# Altium PCB PCB1.PcbDoc
Units mm, origin at the board's own origin, x right, y up, seen from the top; angles counter-clockwise.
Board outline 100.08 x 50.04 mm, 2 copper layers (Top Layer, Bottom Layer); 21 components, 21 nets, 68 pads, 8 vias.
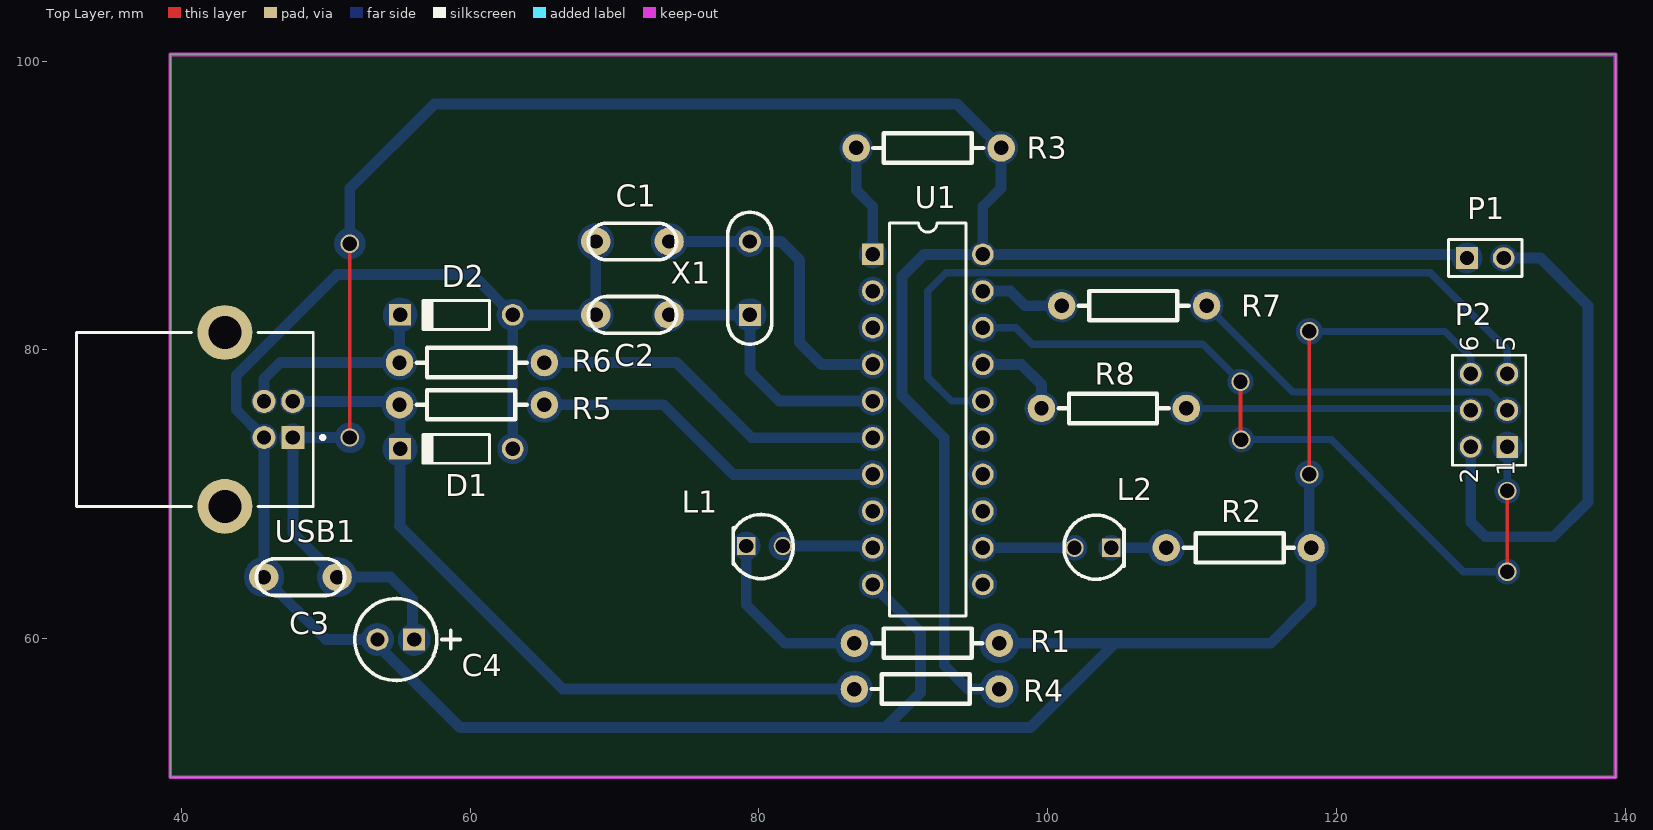
[diagram p0: Top Layer view]
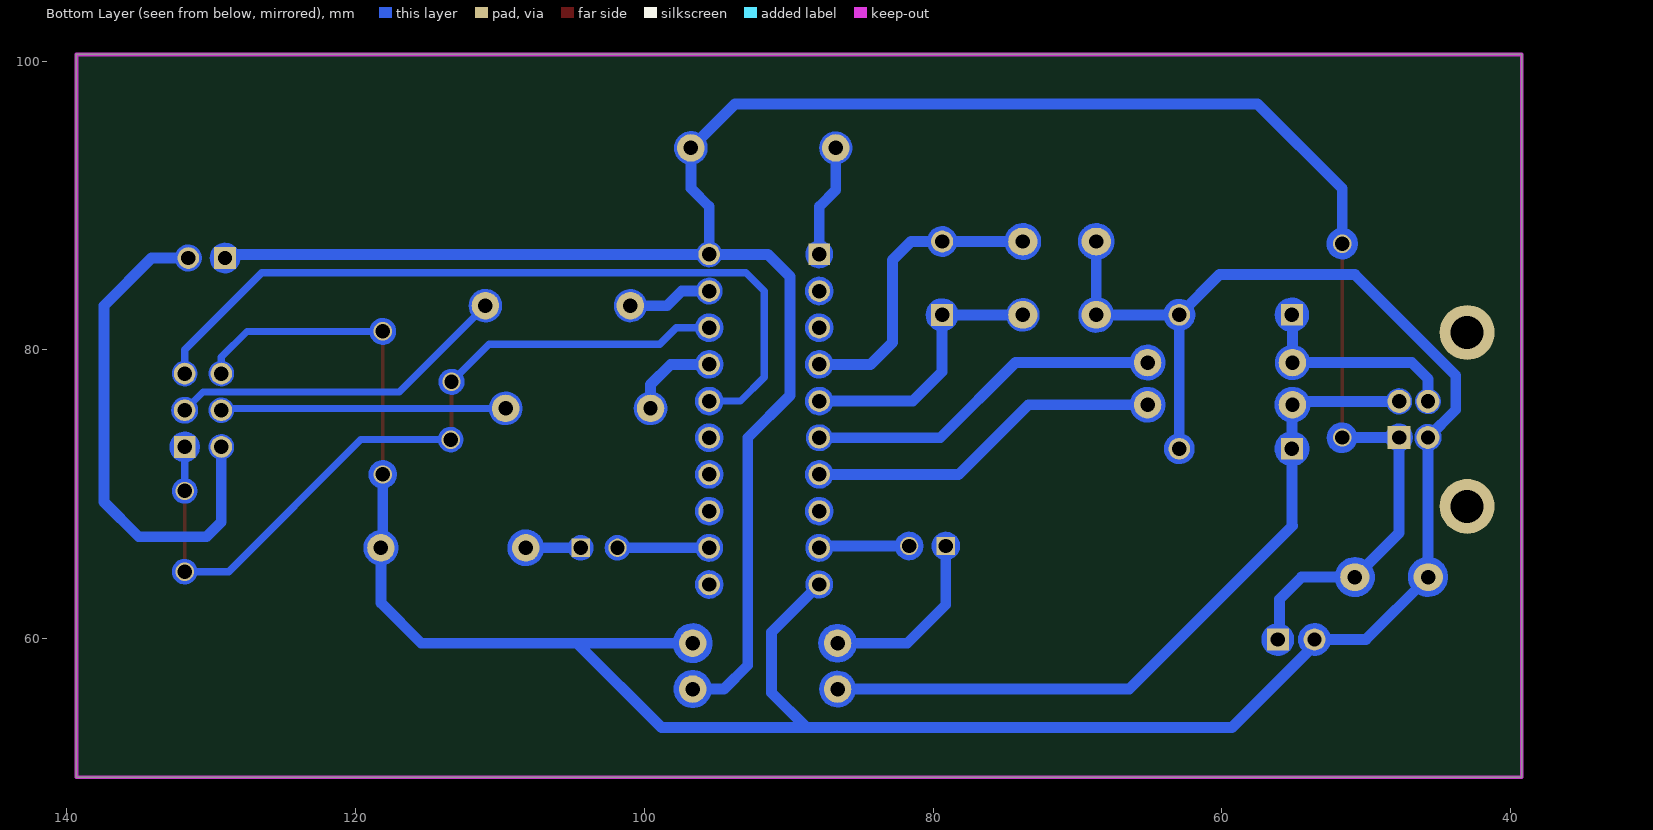
[diagram p1: Bottom Layer view, seen from below]
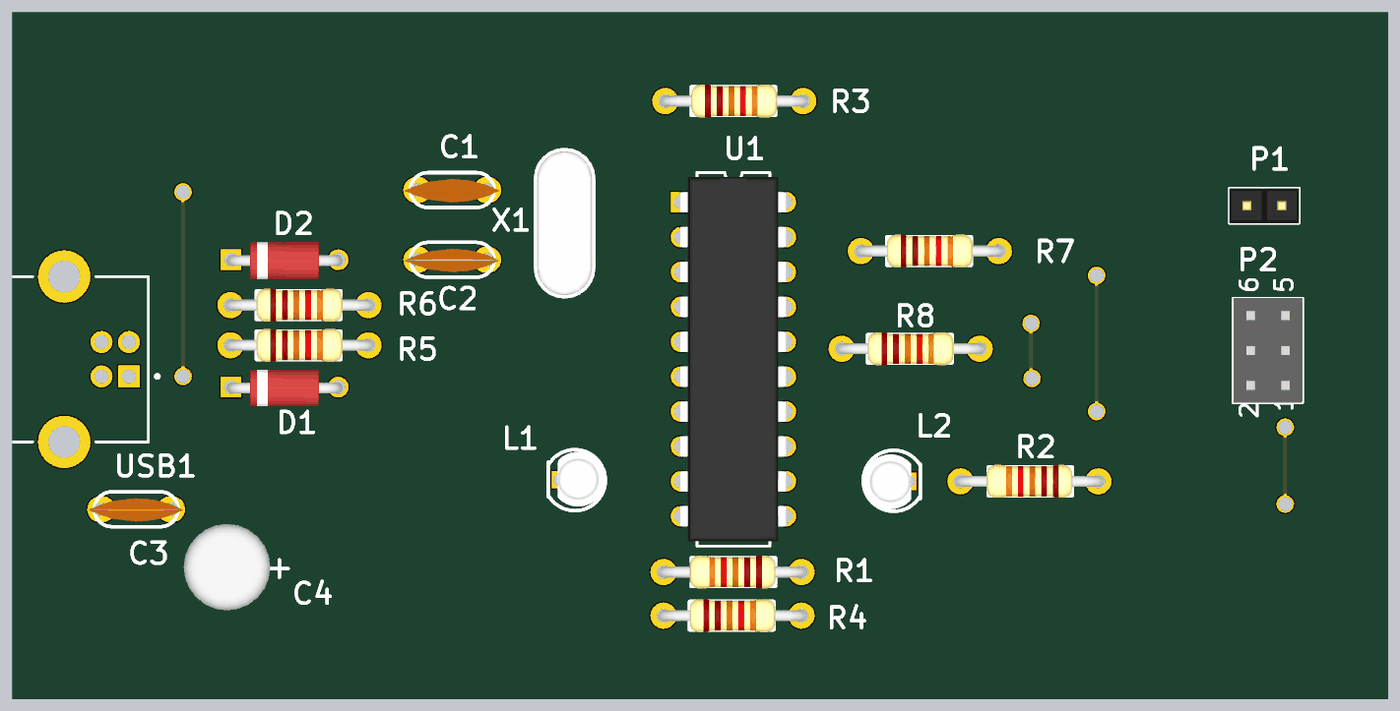
[diagram p2: 3D render of the assembled board from above, using the file's embedded part models]

## Layer stack, top to bottom
Top Layer: signal copper 0.0356
Dielectric: dielectric 0.32, FR-4, Dk 4.8
Bottom Layer: signal copper 0.0356

## Board outline
39.243,50.419 39.243,100.457 139.319,100.457 139.319,50.419

## Design rules (kind name [scope] priority, off if disabled: settings)
Clearance [All] p1 off: gap=0.254
Height [All] p1 off: minheight=0 maxheight=25.4 prefheight=12.7
NetAntennae [All] p1 off: netantennaetolerance=0
PolygonConnect [All] p1: connectstyle=Relief reliefconductorwidth=0.254 reliefentries=4 polygonreliefangle="90 Angle"
RoutingVias [All] p1: holewidth=0.711 width=1.27 viastyle="Through Hole" minholewidth=0.711 minwidth=1.27 maxholewidth=0.711 maxwidth=1.27
SilkscreenOverComponentPads [All] p1: minsilkscreentomaskgap=0.254
SolderMaskExpansion [All] p1: expansion=0.102
Width [All] p1 off: maxlimit=1 minlimit=0.254 preferedwidth=0.75 toplayer_maxwidth=0.254 toplayer_prefwidth=0.254 bottomlayer_minwidth=0.5 minimp=50.000000 maximp=50.000000 favimp=50.000000
25 further rules are at their usual default settings.

## Components (designator, comment, footprint, x,y, rotation, side; value= is the part's Value field where it differs from the comment)
C1 "Cap" "CAP CER 100nF (25V) - UP" 68.707,87.503 r0 top
C2 "Cap" "CAP CER 100nF (25V) - UP" 68.707,82.423 r0 top
C3 "Cap" "CAP CER 100nF (25V) - UP" 45.72,64.262 r0 top
C4 "CAP100RP-SC" CAP100RP 56.134,59.944 r180 top
D1 "D Zener" "DIODE ZENER" 59.055,73.152 r180 top
D2 "D Zener" "DIODE ZENER" 59.055,82.423 r180 top
L1 "LED3MM" LED3MM 79.121,66.421 r90 top
L2 "LED3MM" LED3MM 104.394,66.294 r270 top
P1 "Header 2" HEADER1X2 129.032,86.36 r0 top
P2 "Header 3X2" ISP 131.826,73.279 r90 top
R1 "Res3" "AXIAL-0.4 - DOWN" 96.647,59.69 r180 top
R2 "Res3" "AXIAL-0.4 - DOWN" 118.237,66.294 r180 top
R3 "Res1" "AXIAL-0.4 - DOWN" 86.741,93.98 r0 top
R4 "Res3" "AXIAL-0.4 - DOWN" 86.614,56.515 r0 top
R5 "Res3" "AXIAL-0.4 - DOWN" 55.118,76.2 r0 top
R6 "Res3" "AXIAL-0.4 - DOWN" 55.118,79.121 r0 top
R7 "Res3" "AXIAL-0.4 - DOWN" 100.965,83.058 r0 top
R8 "Res3" "AXIAL-0.4 - DOWN" 99.568,75.946 r0 top
U1 "AT90S2313-10PC" DIP-20P 91.694,75.184 r270 top
USB1 "USB" USB2.5-2H4D 46.736,75.184 r180 top
X1 "CRISTAL" CRISTAL 79.375,82.423 r90 top

## Footprints (in the part's own frame and the unit in brackets; to place one, negate y for a bottom-side part, rotate by r counter-clockwise, add the part's x,y. Pads: shape width x height; smd on the part's side, far side on the other; paste and mask are expansions set on the pad)
"AXIAL-0.4 - DOWN" [mm]
  round 1.905 hole 1: 1(0,0) 2(10.033,0)
  silkscreen extent 1.19,-1.02 8.81,1.02, body extent -0.39,-1.2 10.41,1.2, height 2.6
CAP100RP [mil]
  round 60 hole 39.37: 1(100,0)
  rect 60x60 hole 39.37: 2(0,0)
  silkscreen extent -125,-112 162,112, body extent -74,-128 174,120, height 472
"CAP CER 100nF (25V) - UP" [mm]
  oval 2.032x1.905 hole 1: 1(0,0) 2(5.08,0)
  silkscreen extent -0.5,-1.27 5.58,1.27, body extent -1,-0.9 6,0.8, height 7.5
CRISTAL [mil]
  rect 60x60 hole 39.37: 1(0,0)
  round 60 hole 39.37: 2(200,0)
  silkscreen extent -80,-60 280,60, body extent -111,-90 321,87, height 142
"DIODE ZENER" [mm] "Diode, Axial; Body 4.6 x 1.9 mm (LxDia. max), Lead Dia. 0.53 mm (max)"
  round 1.5 hole 1: 1(-3.9,0)
  rect 1.5x1.5 hole 1: 2(3.9,0)
  silkscreen extent -2.3,-1 2.4,1, body extent -4.2,-1.27 4.2,1.4, height 1.27
DIP-20P [mm] "DIP; 20 Leads; Row Spacing 7.62 mm; Pitch 2.54 mm"
  rect 1.5x1.5 hole 1: 1(-11.43,-3.81)
  round 1.5 hole 1: 2(-8.89,-3.81) 3(-6.35,-3.81) 4(-3.81,-3.81) 5(-1.27,-3.81) 6(1.27,-3.81) 7(3.81,-3.81) 8(6.35,-3.81) 9(8.89,-3.81) 10(11.43,-3.81) 11(11.43,3.81) 12(8.89,3.81) 13(6.35,3.81) 14(3.81,3.81) 15(1.27,3.81) 16(-1.27,3.81) 17(-3.81,3.81) 18(-6.35,3.81) 19(-8.89,3.81) 20(-11.43,3.81)
  silkscreen extent -13.6,-2.65 13.6,2.65, body extent -13.27,-3.94 13.27,3.88, height 4.57
HEADER1X2 [mm] "Connector; Header; 2 Position"
  rect 1.5x1.5 hole 1: 1(0,0)
  round 1.5 hole 1: 2(2.54,0)
  silkscreen extent -1.27,-1.27 3.81,1.27, body extent -1.27,-1.27 3.81,1.27, height 8.43
ISP [mm] "Connector; Header; 3x2 Position;ISP"
  rect 1.5x1.5 hole 1: 1(0,0)
  round 1.5 hole 1: 2(0,2.54) 3(2.54,0) 4(2.54,2.54) 5(5.08,0) 6(5.08,2.54)
  silkscreen extent -1.27,-1.27 6.35,3.81, body extent -1.27,-1.27 6.35,3.77, height 8.5
LED3MM [mm]
  round 1.27 hole 1: 1(0,-2.54)
  rect 1.27x1.27 hole 1: 2(0,0)
  silkscreen extent -2.26,-3.26 2.18,0.89, body extent -1.97,-3.28 2.03,0.24, height 25.4
USB2.5-2H4D [mm] "Connector; USB1.1, Type B, Thru-Hole; 4 Position; Right Angle"
  rect 1.6x1.6 hole 1: 1(-1,1.25)
  round 1.6 hole 1: 2(-1,-1.25) 3(1,-1.25) 4(1,1.25)
  round 3.8 hole 2.3: 5(3.71,6.02) 6(3.71,-6.02)
  silkscreen extent -3.18,-6.02 13.99,6.02, body extent -2.41,-6.02 13.99,6.02, height 11.1

## Part data
C1 C2 C3: "Capacitor"
D1 D2: "Zener Diode"
P1: "Header, 2-Pin"
P2: "Header, 3-Pin, Dual row"
R1 R2 R3 R4 R5 R6 R7 R8: "Resistor"
U1: "8-Bit AVR Microcontroller with 2K Bytes of In-System Programmable Flash Memory"

## Via types
v1: diameter 1.27, hole 1, Top Layer to Bottom Layer, 8 vias

## Nets (pads, with @x,y where several pads share a name; then routed paths per layer and width w, separated by ;. In a path a pad name is that pad's centre, name@x,y a point inside that pad or via, vN(x,y) a via of type N, cw(c..) or ccw(c..) an arc to the next point about the centre after c; other vN are vias at no path point)
GND: C1.1 C2.1 C3.1 C4.1 D1.1 D2.1 P2.6 R1.1 R2.1 U1.10 USB1.4 | length 262
  Top Layer w0.254: v1(118.11,71.374) v1(118.11,81.28)
  Bottom Layer w0.5: v1(118.11,81.28) 127.508,81.28 129.286,79.502 P2.6 ; USB1.4@46.429,73.934 ccw(c45.736,73.934) USB1.4@46.429,73.934 ; 46.879,64.278 ccw(c45.736,64.278) 46.879,64.278 ; 54.483,59.944 ccw(c53.594,59.944) 54.483,59.944 ; 63.774,73.152 ccw(c62.955,73.152) 63.774,73.152 ; 63.816,82.423 ccw(c62.955,82.423) 63.816,82.423 ; C2.1@69.699,82.423 ccw(c68.707,82.423) C2.1@69.699,82.423 ; 69.731,87.503 ccw(c68.707,87.503) 69.731,87.503 ; U1.10@88.602,63.754 ccw(c87.884,63.754) U1.10@88.602,63.754 ; 97.783,59.69 ccw(c96.647,59.69) 97.783,59.69 ; 118.794,81.28 ccw(c118.11,81.28) 118.794,81.28 ; 118.851,71.374 ccw(c118.11,71.374) 118.851,71.374 ; 119.204,66.294 ccw(c118.237,66.294) 119.204,66.294 ; P2.6@129.921,78.359 ccw(c129.286,78.359) P2.6@129.921,78.359
  Bottom Layer w0.75: D1.1 D2.1 ; C1.1 C2.1 D2.1 ; U1.10 91.186,60.452 91.186,56.261 88.773,53.848 ; R1.1@96.647,59.309 97.028,59.69 104.648,59.69 ; v1(118.11,71.374) 118.11,66.421 R2.1 118.237,62.484 115.443,59.69 104.648,59.69 ; D2.1 60.161,85.217 50.8,85.217 43.815,78.232 43.815,75.855 USB1.4 45.736,64.278 C3.1 50.038,59.944 C4.1 53.594,59.563 59.309,53.848 88.773,53.848 ; 88.773,53.848 98.806,53.848 104.648,59.69
NetC1_2: C1.2 U1.4 X1.2 | length 37.2
  Bottom Layer w0.5: 74.811,87.503 ccw(c73.787,87.503) 74.811,87.503 ; 80.188,87.503 ccw(c79.375,87.503) 80.188,87.503 ; U1.4@88.625,78.994 ccw(c87.884,78.994) U1.4@88.625,78.994
  Bottom Layer w0.75: C1.2 X1.2 81.534,87.503 82.804,86.233 82.804,80.518 84.328,78.994 U1.4
NetC2_2: C2.2 U1.5 X1.1 | length 34.9
  Bottom Layer w0.5: C2.2@74.703,82.423 ccw(c73.787,82.423) C2.2@74.703,82.423 ; 80.273,82.423 ccw(c79.375,82.423) 80.273,82.423 ; U1.5@88.625,76.454 ccw(c87.884,76.454) U1.5@88.625,76.454
  Bottom Layer w0.75: C2.2 X1.1 79.375,78.486 81.407,76.454 U1.5
NetD1_2: D1.2 R4.1 R5.1 USB1.2 | length 78.3
  Bottom Layer w0.5: 54.154,76.434 cw(c55.118,76.2) 56.11,76.2 ; 55.155,75.209 ccw(c55.118,76.2) 56.11,76.2 ; 56.11,76.2 ccw(c55.118,76.2) 56.11,76.2 ; USB1.2@48.396,76.434 ccw(c47.736,76.434) USB1.2@48.396,76.434 ; 56.115,73.152 ccw(c55.155,73.152) 56.115,73.152 ; 87.638,56.515 ccw(c86.614,56.515) 87.638,56.515
  Bottom Layer w0.75: USB1.2 54.154,76.434 ; R5.1 55.155,76.163 55.155,75.209 D1.2 55.155,67.855 55.118,67.818 66.421,56.515 R4.1
NetD2_2: D2.2 R6.1 USB1.3 | length 30.8
  Bottom Layer w0.5: USB1.3@46.378,76.434 ccw(c45.736,76.434) USB1.3@46.378,76.434 ; 56.085,79.121 ccw(c55.118,79.121) 56.085,79.121 ; 56.102,82.423 ccw(c55.155,82.423) 56.102,82.423
  Bottom Layer w0.75: USB1.3 45.736,77.994 46.863,79.121 R6.1 55.124,79.127 D2.2@55.124,82.423
NetL1_1: L1.1 U1.9 | length 15.4
  Bottom Layer w0.5: 82.402,66.421 ccw(c81.661,66.421) 82.402,66.421 ; U1.9@88.602,66.294 ccw(c87.884,66.294) U1.9@88.602,66.294
  Bottom Layer w0.75: L1.1 87.757,66.421 U1.9
NetL1_2: L1.2 R1.2 | length 24.3
  Bottom Layer w0.5: 79.862,66.421 ccw(c79.121,66.421) 79.862,66.421 ; 87.706,59.69 ccw(c86.614,59.69) 87.706,59.69
  Bottom Layer w0.75: L1.2 79.121,62.357 81.788,59.69 86.233,59.69 R1.2@86.614,59.309
NetL2_1: L2.1 U1.12 | length 14.9
  Bottom Layer w0.5: U1.12@96.222,66.294 ccw(c95.504,66.294) U1.12@96.222,66.294 ; 102.489,66.294 ccw(c101.854,66.294) 102.489,66.294
  Bottom Layer w0.75: U1.12 L2.1
NetL2_2: L2.2 R2.2 | length 14.2
  Bottom Layer w0.5: 105.029,66.294 ccw(c104.394,66.294) 105.029,66.294 ; 109.228,66.294 ccw(c108.204,66.294) 109.228,66.294
  Bottom Layer w0.75: L2.2 R2.2
NetP1_2: P1.2 P2.2 | length 43.8
  Bottom Layer w0.5: P2.2@129.921,73.279 ccw(c129.286,73.279) P2.2@129.921,73.279 ; P1.2@132.256,86.36 ccw(c131.572,86.36) P1.2@132.256,86.36
  Bottom Layer w0.75: P2.2 129.286,68.072 130.302,67.056 135.001,67.056 137.414,69.469 137.414,83.058 134.112,86.36 P1.2
NetP2_1: P2.1 U1.18 | length 80.4
  Top Layer w0.254: v1@113.347,73.85 v1(113.347,77.787) ; v1(131.826,64.643) v1(131.826,70.231) v1@131.826,70.612
  Bottom Layer w0.5: U1.18 97.79,81.534 98.933,80.391 110.744,80.391 v1(113.347,77.787) ; v1(113.411,73.787) 119.634,73.787 128.778,64.643 v1(131.826,64.643) ; v1(131.826,70.231) P2.1 ; U1.18@96.245,81.534 ccw(c95.504,81.534) U1.18@96.245,81.534 ; 114.001,77.787 ccw(c113.347,77.787) 114.001,77.787 ; 114.046,73.787 ccw(c113.411,73.787) 114.046,73.787 ; 132.461,64.643 ccw(c131.826,64.643) 132.461,64.643 ; 132.461,70.231 ccw(c131.826,70.231) 132.461,70.231 ; 132.639,73.279 ccw(c131.826,73.279) 132.639,73.279
NetP2_3: P2.3 R7.2 | length 33.9
  Bottom Layer w0.5: R7.2 116.967,77.089 130.556,77.089 P2.3 ; R7.2@111.914,83.058 ccw(c110.998,83.058) R7.2@111.914,83.058 ; P2.3@132.51,75.819 ccw(c131.826,75.819) P2.3@132.51,75.819
NetP2_4: P2.4 R8.2 | length 29.4
  Bottom Layer w0.5: R8.2 P2.4@129.286,75.946 ; R8.2@110.517,75.946 ccw(c109.601,75.946) R8.2@110.517,75.946 ; P2.4@129.921,75.819 ccw(c129.286,75.819) P2.4@129.921,75.819
NetP2_5: P2.5 U1.16 | length 63.6
  Bottom Layer w0.5: U1.16 93.345,76.454 91.694,78.105 91.694,84.074 92.964,85.344 126.492,85.344 131.826,80.01 P2.5 ; U1.16@96.245,76.454 ccw(c95.504,76.454) U1.16@96.245,76.454 ; P2.5@132.461,78.359 ccw(c131.826,78.359) P2.5@132.461,78.359
NetR3_1: R3.1 U1.1 | length 18
  Bottom Layer w0.5: R3.1@87.639,93.98 ccw(c86.741,93.98) R3.1@87.639,93.98 ; U1.1@88.602,86.614 ccw(c87.884,86.614) U1.1@88.602,86.614
  Bottom Layer w0.75: R3.1 86.741,91.059 87.884,89.916 U1.1
NetR5_2: R5.2 U1.7 | length 35.6
  Bottom Layer w0.5: 66.143,76.2 ccw(c65.151,76.2) 66.143,76.2 ; U1.7@88.625,71.374 ccw(c87.884,71.374) U1.7@88.625,71.374
  Bottom Layer w0.75: R5.2 73.406,76.2 78.232,71.374 U1.7
NetR6_2: R6.2 U1.6 | length 35.4
  Bottom Layer w0.5: 66.143,79.121 ccw(c65.151,79.121) 66.143,79.121 ; U1.6@88.568,73.914 ccw(c87.884,73.914) U1.6@88.568,73.914
  Bottom Layer w0.75: R6.2 74.295,79.121 79.502,73.914 U1.6
NetR7_1: R7.1 U1.19 | length 14.9
  Bottom Layer w0.5: U1.19@96.188,84.074 ccw(c95.504,84.074) U1.19@96.188,84.074 ; R7.1@101.863,83.058 ccw(c100.965,83.058) R7.1@101.863,83.058
  Bottom Layer w0.75: U1.19 97.409,84.074 98.425,83.058 R7.1@100.076,83.058
NetR8_1: R8.1 U1.17 | length 16.7
  Bottom Layer w0.5: U1.17@96.245,78.994 ccw(c95.504,78.994) U1.17@96.245,78.994 ; R8.1@100.484,75.946 ccw(c99.568,75.946) R8.1@100.484,75.946
  Bottom Layer w0.75: U1.17 98.171,78.994 99.568,77.597 R8.1
NetU1_11: U1.11
VCC: C3.2 C4.2 P1.1 R3.2 R4.2 U1.20 USB1.1 | length 215.2
  Top Layer w0.254: v1(51.669,73.934) v1(51.669,87.356)
  Bottom Layer w0.5: USB1.1@47.736,73.217 ccw(c47.736,73.934) USB1.1@48.453,73.934 ; 49.997,65.065 cw(c50.8,64.262) 51.936,64.262 ; U1.20@94.856,86.614 cw(c95.504,86.614) 95.504,87.262 cw(c95.504,86.614) U1.20@96.152,86.614 ; USB1.1@48.453,73.934 ccw(c47.736,73.934) USB1.1@48.453,73.934 ; 51.936,64.262 ccw(c50.8,64.262) 51.936,64.262 ; U1.20@96.152,86.614 ccw(c95.504,86.614) U1.20@96.152,86.614 ; 52.502,73.914 ccw(c51.689,73.914) 52.502,73.914 ; 52.51,87.356 ccw(c51.669,87.356) 52.51,87.356 ; 57.023,59.944 ccw(c56.134,59.944) 57.023,59.944 ; R3.2@97.69,93.98 ccw(c96.774,93.98) R3.2@97.69,93.98 ; 129.845,86.36 ccw(c129.032,86.36) 129.845,86.36
  Bottom Layer w0.75: USB1.1@47.736,73.217 47.736,67.326 49.997,65.065 C3.2 ; USB1.1 48.453,73.934 v1(51.669,73.934) ; v1(51.669,87.356) 51.669,91.166 57.531,97.028 93.726,97.028 R3.2 96.774,91.186 95.504,89.916 U1.20@95.504,87.262 ; 51.936,64.262 54.483,64.262 56.007,62.738 56.007,60.071 C4.2 ; U1.20 94.856,86.614 91.44,86.614 89.916,85.09 89.916,76.835 92.837,73.914 92.837,58.166 94.488,56.515 R4.2 ; U1.20@96.152,86.614 128.778,86.614 P1.1
pads on no net: U1.2 U1.3 U1.8 U1.13 U1.14 U1.15 USB1.5 USB1.6
copper on no net: | length 39.3
  Bottom Layer w0.5: 88.625,68.834 ccw(c87.884,68.834) 88.625,68.834 ; 88.625,81.534 ccw(c87.884,81.534) 88.625,81.534 ; 88.625,84.074 ccw(c87.884,84.074) 88.625,84.074 ; 96.245,63.754 ccw(c95.504,63.754) 96.245,63.754 ; 96.245,68.834 ccw(c95.504,68.834) 96.245,68.834 ; 96.245,71.374 ccw(c95.504,71.374) 96.245,71.374 ; 96.245,73.914 ccw(c95.504,73.914) 96.245,73.914 ; 97.725,56.515 ccw(c96.647,56.515) 97.725,56.515

## Keep-outs
Keep-Out Layer:
  the board outline again, w0.254

## Text inside footprints (layer, text, board x,y; h text height)
P2: Top Overlay "1" at 132.334,71.247 h1.27 r90; Top Overlay "2" at 129.794,70.739 h1.27 r90; Top Overlay "5" at 132.334,79.883 h1.27 r90; Top Overlay "6" at 129.794,79.883 h1.27 r90